# Altium PCB PcbPanel.PcbDoc
Units mm, origin at the board's own origin, x right, y up, seen from the top; angles counter-clockwise.
Board outline 157 x 100.4 mm, 2 copper layers (Top Layer, Bottom Layer), stack 1.092 mm thick; 6 components, 178 nets, 10 pads, 0 vias.
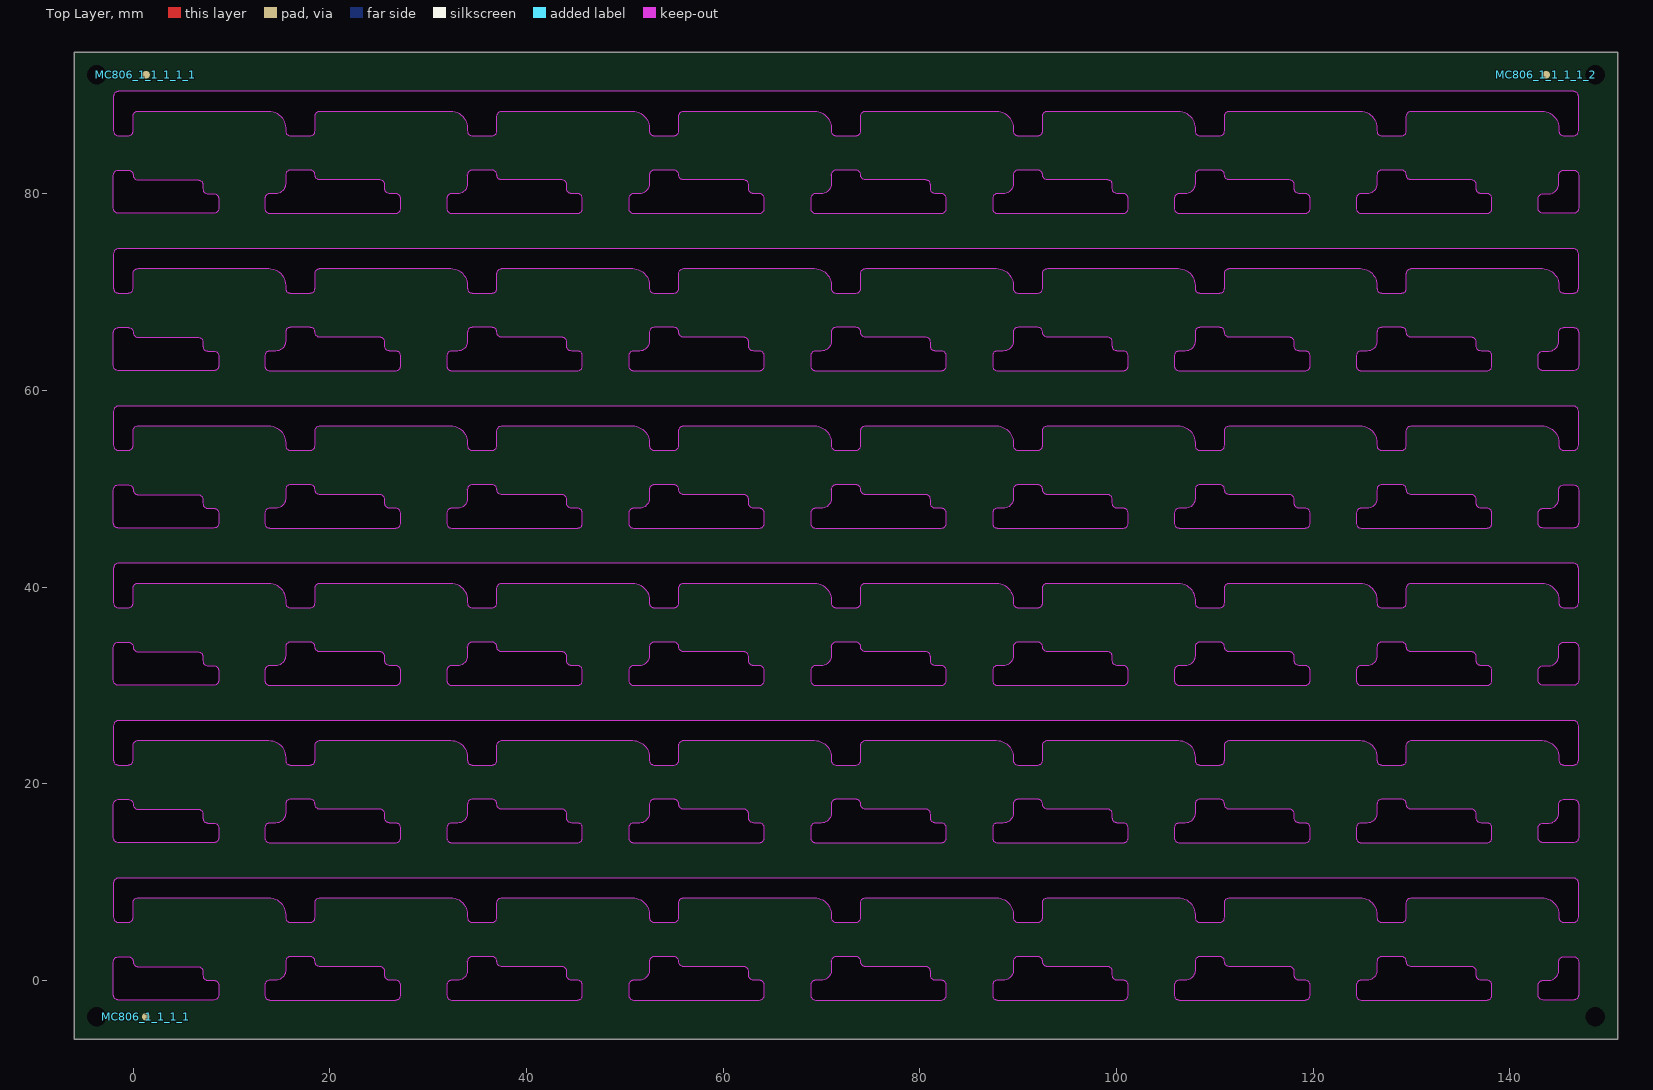
[diagram p0: Top Layer view]
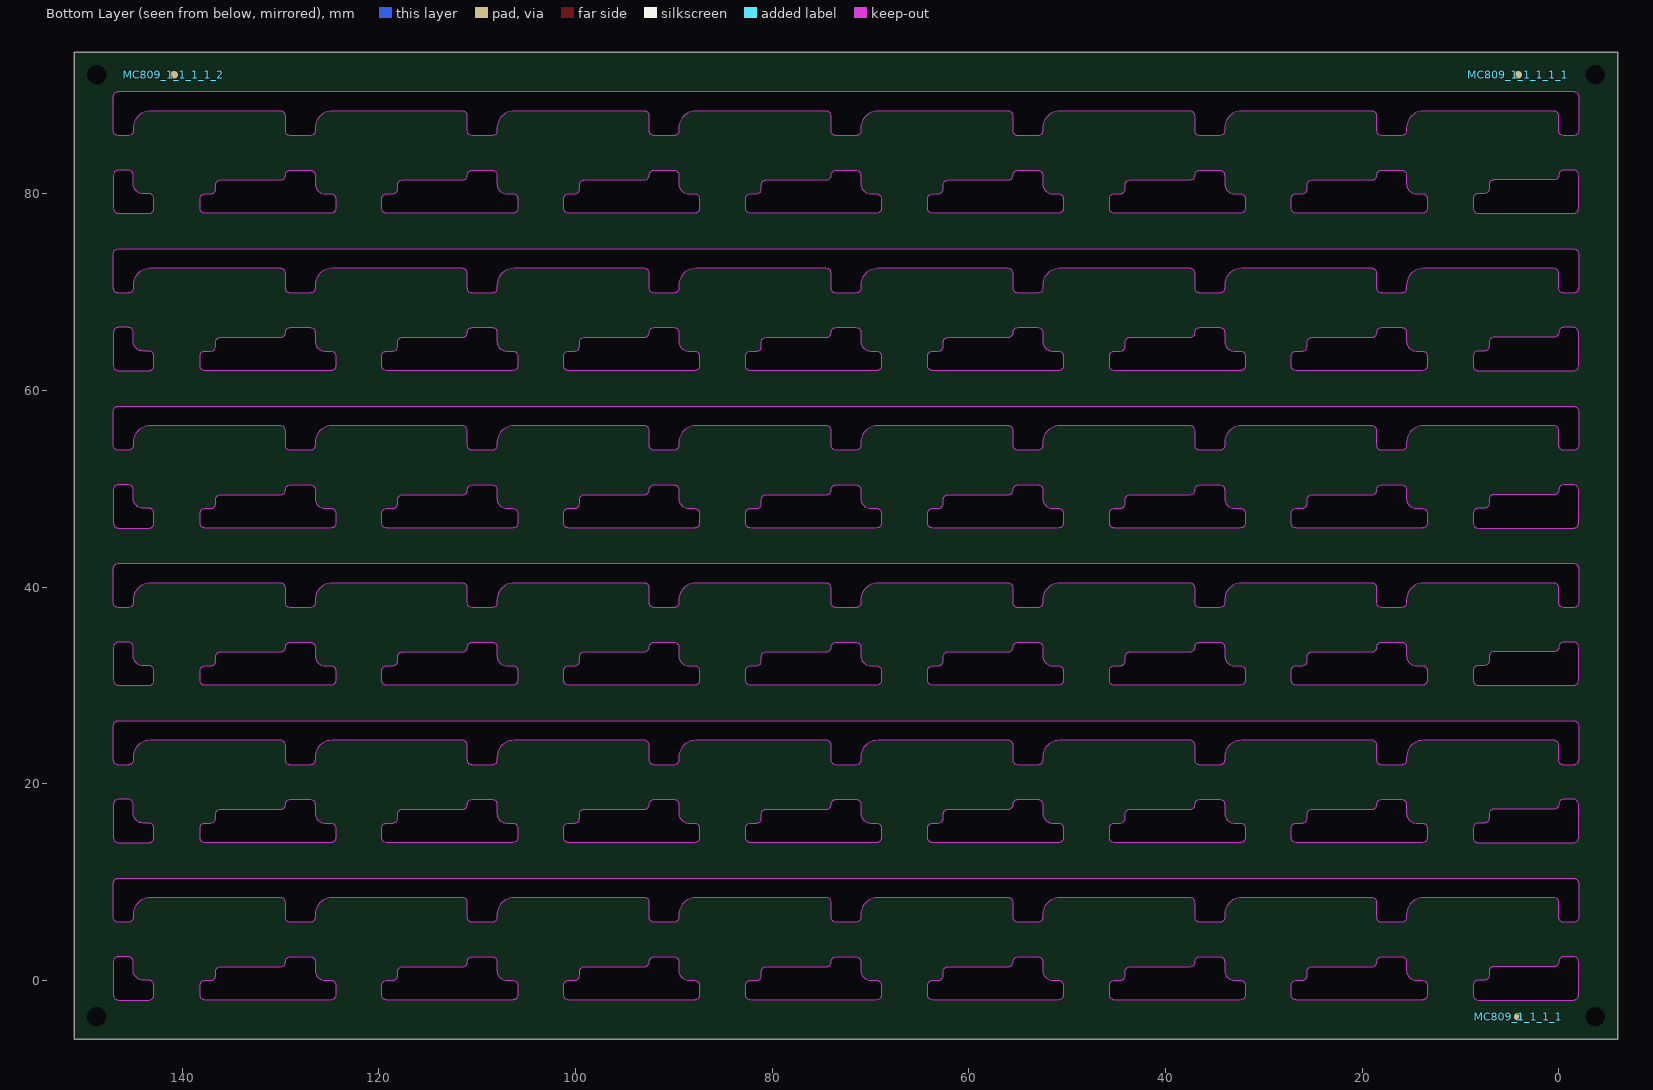
[diagram p1: Bottom Layer view, seen from below]

## Layer stack, top to bottom
Top Solder: solder mask 0.0102, SM-001, Dk 4
Top Layer: signal copper 0.0356
Dielectric 1: prepreg 0.2104, PP-017, Dk 4.3
Dielectric 3: core 0.6, Core-039, Dk 4.8
Dielectric 5: prepreg 0.2104, PP-017, Dk 4.3
Bottom Layer: signal copper 0.0356
Bottom Solder: solder mask 0.0102, SM-001, Dk 4

## Board outline
-6,-6 -6,94.4 151,94.4 151,-6
cut-out: -2,78.5 -2,81.9 cw(c-1.5,81.9) -1.5,82.4 -0.5,82.4 cw(c-0.5,81.9) 0,81.9 ccw(c0.5,81.9) 0.5,81.4 6.6,81.4 cw(c6.6,80.9) 7.1,80.9 7.1,80.5 ccw(c7.6,80.5) 7.6,80 8.2,80 cw(c8.2,79.5) 8.7,79.5 8.7,78.5 cw(c8.2,78.5) 8.2,78 -1.5,78 cw(c-1.5,78.5)
cut-out: 13.4,78.5 ccw(c13.9,78.5) 13.9,78 26.7,78 ccw(c26.7,78.5) 27.2,78.5 27.2,79.5 ccw(c26.7,79.5) 26.7,80 26.1,80 cw(c26.1,80.5) 25.6,80.5 25.6,80.9 ccw(c25.1,80.9) 25.1,81.4 19,81.4 cw(c19,81.9) 18.5,81.9 ccw(c18,81.9) 18,82.4 16,82.4 ccw(c16,81.9) 15.5,81.9 15.5,81 cw(c14.5,81) 14.5,80 13.9,80 ccw(c13.9,79.5) 13.4,79.5
cut-out: 31.9,78.5 ccw(c32.4,78.5) 32.4,78 45.2,78 ccw(c45.2,78.5) 45.7,78.5 45.7,79.5 ccw(c45.2,79.5) 45.2,80 44.6,80 cw(c44.6,80.5) 44.1,80.5 44.1,80.9 ccw(c43.6,80.9) 43.6,81.4 37.5,81.4 cw(c37.5,81.9) 37,81.9 ccw(c36.5,81.9) 36.5,82.4 34.5,82.4 ccw(c34.5,81.9) 34,81.9 34,81.922 34,81 cw(c33,81) 33,80 32.4,80 ccw(c32.4,79.5) 31.9,79.5
cut-out: 50.4,78.5 ccw(c50.9,78.5) 50.9,78 63.7,78 ccw(c63.7,78.5) 64.2,78.5 64.2,79.5 ccw(c63.7,79.5) 63.7,80 63.1,80 cw(c63.1,80.5) 62.6,80.5 62.6,80.9 ccw(c62.1,80.9) 62.1,81.4 56,81.4 cw(c56,81.9) 55.5,81.9 ccw(c55,81.9) 55,82.4 53,82.4 ccw(c53,81.9) 52.5,81.9 52.5,81 cw(c51.5,81) 51.5,80 50.9,80 ccw(c50.9,79.5) 50.4,79.5
cut-out: 68.9,78.5 ccw(c69.4,78.5) 69.4,78 82.2,78 ccw(c82.2,78.5) 82.7,78.5 82.7,79.5 ccw(c82.2,79.5) 82.2,80 81.6,80 cw(c81.6,80.5) 81.1,80.5 81.1,80.9 ccw(c80.6,80.9) 80.6,81.4 74.5,81.4 cw(c74.5,81.9) 74,81.9 ccw(c73.5,81.9) 73.5,82.4 71.5,82.4 ccw(c71.5,81.9) 71,81.9 71,81.922 71,81 cw(c70,81) 70,80 69.4,80 ccw(c69.4,79.5) 68.9,79.5
cut-out: 87.4,78.5 ccw(c87.9,78.5) 87.9,78 100.7,78 ccw(c100.7,78.5) 101.2,78.5 101.2,79.5 ccw(c100.7,79.5) 100.7,80 100.1,80 cw(c100.1,80.5) 99.6,80.5 99.6,80.9 ccw(c99.1,80.9) 99.1,81.4 93,81.4 cw(c93,81.9) 92.5,81.9 ccw(c92,81.9) 92,82.4 90,82.4 ccw(c90,81.9) 89.5,81.9 89.501,81.9 89.5,81 89.501,81 cw(c88.5,81) 88.5,80 87.9,80 ccw(c87.9,79.5) 87.4,79.5
cut-out: 105.9,78.5 ccw(c106.4,78.5) 106.4,78 119.2,78 ccw(c119.2,78.5) 119.7,78.5 119.7,79.5 ccw(c119.2,79.5) 119.2,80 118.6,80 cw(c118.6,80.5) 118.1,80.5 118.1,80.9 ccw(c117.6,80.9) 117.6,81.4 111.5,81.4 cw(c111.5,81.9) 111,81.9 ccw(c110.5,81.9) 110.5,82.4 108.5,82.4 ccw(c108.5,81.9) 108,81.9 108,81 108.001,81 cw(c107,81) 107,80 106.4,80 ccw(c106.4,79.5) 105.9,79.5
cut-out: 124.4,78.5 ccw(c124.9,78.5) 124.9,78 137.7,78 ccw(c137.7,78.5) 138.2,78.5 138.2,79.5 ccw(c137.7,79.5) 137.7,80 137.1,80 cw(c137.1,80.5) 136.6,80.5 136.6,80.9 ccw(c136.1,80.9) 136.1,81.4 130,81.4 cw(c130,81.9) 129.5,81.9 ccw(c129,81.9) 129,82.4 127,82.4 ccw(c127,81.9) 126.5,81.9 126.501,81.9 126.5,81 126.501,81 cw(c125.5,81) 125.5,80 124.9,80 ccw(c124.9,79.5) 124.4,79.5
cut-out: 142.9,78.5 142.9,79.5 cw(c143.4,79.5) 143.4,80 144,80 ccw(c144,81) 145.001,81 145,81 145,81.9 cw(c145.5,81.9) 145.5,82.4 146.5,82.4 cw(c146.5,81.9) 147,81.9 147,78.5 cw(c146.5,78.5) 146.5,78 143.4,78 cw(c143.4,78.5)
cut-out: -0.5,85.9 ccw(c-0.5,86.4) 0,86.4 0,87.9 cw(c0.5,87.9) 0.5,88.4 13.793,88.4 cw(c13.793,86.692) 15.5,86.692 15.5,86.4 ccw(c16,86.4) 16,85.9 18,85.9 ccw(c18,86.4) 18.5,86.4 18.5,87.9 cw(c19,87.9) 19,88.4 32.293,88.4 cw(c32.293,86.692) 34,86.692 34,86.4 ccw(c34.5,86.4) 34.5,85.9 36.5,85.9 ccw(c36.5,86.4) 37,86.4 37,86.398 37,87.9 cw(c37.5,87.9) 37.5,88.4 50.793,88.4 cw(c50.793,86.692) 52.5,86.692 52.5,86.4 ccw(c53,86.4) 53,85.9 55,85.9 ccw(c55,86.4) 55.5,86.4 55.5,87.9 cw(c56,87.9) 56,88.4 69.293,88.4 cw(c69.293,86.692) 71,86.692 71,86.4 ccw(c71.5,86.4) 71.5,85.9 73.5,85.9 ccw(c73.5,86.4) 74,86.4 74,87.9 cw(c74.5,87.9) 74.5,88.4 87.793,88.4 cw(c87.793,86.692) 89.5,86.692 89.5,86.4 ccw(c90,86.4) 90,85.9 92,85.9 ccw(c92,86.4) 92.5,86.4 92.5,86.398 92.5,87.9 cw(c93,87.9) 93,88.4 106.293,88.4 cw(c106.293,86.692) 108.001,86.692 108,86.4 ccw(c108.5,86.4) 108.5,85.9 110.5,85.9 ccw(c110.5,86.4) 111,86.4 111,87.9 cw(c111.5,87.9) 111.5,88.4 124.793,88.4 cw(c124.793,86.692) 126.501,86.692 126.5,86.4 ccw(c127,86.4) 127,85.9 129,85.9 ccw(c129,86.4) 129.5,86.4 129.5,87.9 cw(c130,87.9) 130,88.4 143.293,88.4 cw(c143.293,86.692) 145.001,86.692 145,86.4 ccw(c145.5,86.4) 145.5,85.9 146.5,85.9 ccw(c146.5,86.4) 147,86.4 147,89.9 ccw(c146.5,89.9) 146.5,90.4 -1.5,90.4 ccw(c-1.5,89.9) -2,89.9 -2,86.4 ccw(c-1.5,86.4) -1.5,85.9
cut-out: -2,62.5 -2,65.9 cw(c-1.5,65.9) -1.5,66.4 -0.5,66.4 cw(c-0.5,65.9) 0,65.9 ccw(c0.5,65.9) 0.5,65.4 6.6,65.4 cw(c6.6,64.9) 7.1,64.9 7.1,64.5 ccw(c7.6,64.5) 7.6,64 8.2,64 cw(c8.2,63.5) 8.7,63.5 8.7,62.5 cw(c8.2,62.5) 8.2,62 -1.5,62 cw(c-1.5,62.5)
cut-out: 13.4,62.5 ccw(c13.9,62.5) 13.9,62 26.7,62 ccw(c26.7,62.5) 27.2,62.5 27.2,63.5 ccw(c26.7,63.5) 26.7,64 26.1,64 cw(c26.1,64.5) 25.6,64.5 25.6,64.9 ccw(c25.1,64.9) 25.1,65.4 19,65.4 cw(c19,65.9) 18.5,65.9 ccw(c18,65.9) 18,66.4 16,66.4 ccw(c16,65.9) 15.5,65.9 15.5,65 cw(c14.5,65) 14.5,64 13.9,64 ccw(c13.9,63.5) 13.4,63.5
cut-out: 31.9,62.5 ccw(c32.4,62.5) 32.4,62 45.2,62 ccw(c45.2,62.5) 45.7,62.5 45.7,63.5 ccw(c45.2,63.5) 45.2,64 44.6,64 cw(c44.6,64.5) 44.1,64.5 44.1,64.9 ccw(c43.6,64.9) 43.6,65.4 37.5,65.4 cw(c37.5,65.9) 37,65.9 ccw(c36.5,65.9) 36.5,66.4 34.5,66.4 ccw(c34.5,65.9) 34,65.9 34,65.922 34,65 cw(c33,65) 33,64 32.4,64 ccw(c32.4,63.5) 31.9,63.5
cut-out: 50.4,62.5 ccw(c50.9,62.5) 50.9,62 63.7,62 ccw(c63.7,62.5) 64.2,62.5 64.2,63.5 ccw(c63.7,63.5) 63.7,64 63.1,64 cw(c63.1,64.5) 62.6,64.5 62.6,64.9 ccw(c62.1,64.9) 62.1,65.4 56,65.4 cw(c56,65.9) 55.5,65.9 ccw(c55,65.9) 55,66.4 53,66.4 ccw(c53,65.9) 52.5,65.9 52.5,65 cw(c51.5,65) 51.5,64 50.9,64 ccw(c50.9,63.5) 50.4,63.5
cut-out: 68.9,62.5 ccw(c69.4,62.5) 69.4,62 82.2,62 ccw(c82.2,62.5) 82.7,62.5 82.7,63.5 ccw(c82.2,63.5) 82.2,64 81.6,64 cw(c81.6,64.5) 81.1,64.5 81.1,64.9 ccw(c80.6,64.9) 80.6,65.4 74.5,65.4 cw(c74.5,65.9) 74,65.9 ccw(c73.5,65.9) 73.5,66.4 71.5,66.4 ccw(c71.5,65.9) 71,65.9 71,65.922 71,65 cw(c70,65) 70,64 69.4,64 ccw(c69.4,63.5) 68.9,63.5
cut-out: 87.4,62.5 ccw(c87.9,62.5) 87.9,62 100.7,62 ccw(c100.7,62.5) 101.2,62.5 101.2,63.5 ccw(c100.7,63.5) 100.7,64 100.1,64 cw(c100.1,64.5) 99.6,64.5 99.6,64.9 ccw(c99.1,64.9) 99.1,65.4 93,65.4 cw(c93,65.9) 92.5,65.9 ccw(c92,65.9) 92,66.4 90,66.4 ccw(c90,65.9) 89.5,65.9 89.501,65.9 89.5,65 89.501,65 cw(c88.5,65) 88.5,64 87.9,64 ccw(c87.9,63.5) 87.4,63.5
cut-out: 105.9,62.5 ccw(c106.4,62.5) 106.4,62 119.2,62 ccw(c119.2,62.5) 119.7,62.5 119.7,63.5 ccw(c119.2,63.5) 119.2,64 118.6,64 cw(c118.6,64.5) 118.1,64.5 118.1,64.9 ccw(c117.6,64.9) 117.6,65.4 111.5,65.4 cw(c111.5,65.9) 111,65.9 ccw(c110.5,65.9) 110.5,66.4 108.5,66.4 ccw(c108.5,65.9) 108,65.9 108,65 108.001,65 cw(c107,65) 107,64 106.4,64 ccw(c106.4,63.5) 105.9,63.5
cut-out: 124.4,62.5 ccw(c124.9,62.5) 124.9,62 137.7,62 ccw(c137.7,62.5) 138.2,62.5 138.2,63.5 ccw(c137.7,63.5) 137.7,64 137.1,64 cw(c137.1,64.5) 136.6,64.5 136.6,64.9 ccw(c136.1,64.9) 136.1,65.4 130,65.4 cw(c130,65.9) 129.5,65.9 ccw(c129,65.9) 129,66.4 127,66.4 ccw(c127,65.9) 126.5,65.9 126.501,65.9 126.5,65 126.501,65 cw(c125.5,65) 125.5,64 124.9,64 ccw(c124.9,63.5) 124.4,63.5
cut-out: 142.9,62.5 142.9,63.5 cw(c143.4,63.5) 143.4,64 144,64 ccw(c144,65) 145.001,65 145,65 145,65.9 cw(c145.5,65.9) 145.5,66.4 146.5,66.4 cw(c146.5,65.9) 147,65.9 147,62.5 cw(c146.5,62.5) 146.5,62 143.4,62 cw(c143.4,62.5)
cut-out: -0.5,69.9 ccw(c-0.5,70.4) 0,70.4 0,71.9 cw(c0.5,71.9) 0.5,72.4 13.793,72.4 cw(c13.793,70.692) 15.5,70.692 15.5,70.4 ccw(c16,70.4) 16,69.9 18,69.9 ccw(c18,70.4) 18.5,70.4 18.5,71.9 cw(c19,71.9) 19,72.4 32.293,72.4 cw(c32.293,70.692) 34,70.692 34,70.4 ccw(c34.5,70.4) 34.5,69.9 36.5,69.9 ccw(c36.5,70.4) 37,70.4 37,70.398 37,71.9 cw(c37.5,71.9) 37.5,72.4 50.793,72.4 cw(c50.793,70.692) 52.5,70.692 52.5,70.4 ccw(c53,70.4) 53,69.9 55,69.9 ccw(c55,70.4) 55.5,70.4 55.5,71.9 cw(c56,71.9) 56,72.4 69.293,72.4 cw(c69.293,70.692) 71,70.692 71,70.4 ccw(c71.5,70.4) 71.5,69.9 73.5,69.9 ccw(c73.5,70.4) 74,70.4 74,71.9 cw(c74.5,71.9) 74.5,72.4 87.793,72.4 cw(c87.793,70.692) 89.5,70.692 89.5,70.4 ccw(c90,70.4) 90,69.9 92,69.9 ccw(c92,70.4) 92.5,70.4 92.5,70.398 92.5,71.9 cw(c93,71.9) 93,72.4 106.293,72.4 cw(c106.293,70.692) 108.001,70.692 108,70.4 ccw(c108.5,70.4) 108.5,69.9 110.5,69.9 ccw(c110.5,70.4) 111,70.4 111,71.9 cw(c111.5,71.9) 111.5,72.4 124.793,72.4 cw(c124.793,70.692) 126.501,70.692 126.5,70.4 ccw(c127,70.4) 127,69.9 129,69.9 ccw(c129,70.4) 129.5,70.4 129.5,71.9 cw(c130,71.9) 130,72.4 143.293,72.4 cw(c143.293,70.692) 145.001,70.692 145,70.4 ccw(c145.5,70.4) 145.5,69.9 146.5,69.9 ccw(c146.5,70.4) 147,70.4 147,73.9 ccw(c146.5,73.9) 146.5,74.4 -1.5,74.4 ccw(c-1.5,73.9) -2,73.9 -2,70.4 ccw(c-1.5,70.4) -1.5,69.9
cut-out: -2,46.5 -2,49.9 cw(c-1.5,49.9) -1.5,50.4 -0.5,50.4 cw(c-0.5,49.9) 0,49.9 ccw(c0.5,49.9) 0.5,49.4 6.6,49.4 cw(c6.6,48.9) 7.1,48.9 7.1,48.5 ccw(c7.6,48.5) 7.6,48 8.2,48 cw(c8.2,47.5) 8.7,47.5 8.7,46.5 cw(c8.2,46.5) 8.2,46 -1.5,46 cw(c-1.5,46.5)
cut-out: 13.4,46.5 ccw(c13.9,46.5) 13.9,46 26.7,46 ccw(c26.7,46.5) 27.2,46.5 27.2,47.5 ccw(c26.7,47.5) 26.7,48 26.1,48 cw(c26.1,48.5) 25.6,48.5 25.6,48.9 ccw(c25.1,48.9) 25.1,49.4 19,49.4 cw(c19,49.9) 18.5,49.9 ccw(c18,49.9) 18,50.4 16,50.4 ccw(c16,49.9) 15.5,49.9 15.5,49 cw(c14.5,49) 14.5,48 13.9,48 ccw(c13.9,47.5) 13.4,47.5
cut-out: 31.9,46.5 ccw(c32.4,46.5) 32.4,46 45.2,46 ccw(c45.2,46.5) 45.7,46.5 45.7,47.5 ccw(c45.2,47.5) 45.2,48 44.6,48 cw(c44.6,48.5) 44.1,48.5 44.1,48.9 ccw(c43.6,48.9) 43.6,49.4 37.5,49.4 cw(c37.5,49.9) 37,49.9 ccw(c36.5,49.9) 36.5,50.4 34.5,50.4 ccw(c34.5,49.9) 34,49.9 34,49.922 34,49 cw(c33,49) 33,48 32.4,48 ccw(c32.4,47.5) 31.9,47.5
cut-out: 50.4,46.5 ccw(c50.9,46.5) 50.9,46 63.7,46 ccw(c63.7,46.5) 64.2,46.5 64.2,47.5 ccw(c63.7,47.5) 63.7,48 63.1,48 cw(c63.1,48.5) 62.6,48.5 62.6,48.9 ccw(c62.1,48.9) 62.1,49.4 56,49.4 cw(c56,49.9) 55.5,49.9 ccw(c55,49.9) 55,50.4 53,50.4 ccw(c53,49.9) 52.5,49.9 52.5,49 cw(c51.5,49) 51.5,48 50.9,48 ccw(c50.9,47.5) 50.4,47.5
cut-out: 68.9,46.5 ccw(c69.4,46.5) 69.4,46 82.2,46 ccw(c82.2,46.5) 82.7,46.5 82.7,47.5 ccw(c82.2,47.5) 82.2,48 81.6,48 cw(c81.6,48.5) 81.1,48.5 81.1,48.9 ccw(c80.6,48.9) 80.6,49.4 74.5,49.4 cw(c74.5,49.9) 74,49.9 ccw(c73.5,49.9) 73.5,50.4 71.5,50.4 ccw(c71.5,49.9) 71,49.9 71,49.922 71,49 cw(c70,49) 70,48 69.4,48 ccw(c69.4,47.5) 68.9,47.5
cut-out: 87.4,46.5 ccw(c87.9,46.5) 87.9,46 100.7,46 ccw(c100.7,46.5) 101.2,46.5 101.2,47.5 ccw(c100.7,47.5) 100.7,48 100.1,48 cw(c100.1,48.5) 99.6,48.5 99.6,48.9 ccw(c99.1,48.9) 99.1,49.4 93,49.4 cw(c93,49.9) 92.5,49.9 ccw(c92,49.9) 92,50.4 90,50.4 ccw(c90,49.9) 89.5,49.9 89.501,49.9 89.5,49 89.501,49 cw(c88.5,49) 88.5,48 87.9,48 ccw(c87.9,47.5) 87.4,47.5
cut-out: 105.9,46.5 ccw(c106.4,46.5) 106.4,46 119.2,46 ccw(c119.2,46.5) 119.7,46.5 119.7,47.5 ccw(c119.2,47.5) 119.2,48 118.6,48 cw(c118.6,48.5) 118.1,48.5 118.1,48.9 ccw(c117.6,48.9) 117.6,49.4 111.5,49.4 cw(c111.5,49.9) 111,49.9 ccw(c110.5,49.9) 110.5,50.4 108.5,50.4 ccw(c108.5,49.9) 108,49.9 108,49 108.001,49 cw(c107,49) 107,48 106.4,48 ccw(c106.4,47.5) 105.9,47.5
cut-out: 124.4,46.5 ccw(c124.9,46.5) 124.9,46 137.7,46 ccw(c137.7,46.5) 138.2,46.5 138.2,47.5 ccw(c137.7,47.5) 137.7,48 137.1,48 cw(c137.1,48.5) 136.6,48.5 136.6,48.9 ccw(c136.1,48.9) 136.1,49.4 130,49.4 cw(c130,49.9) 129.5,49.9 ccw(c129,49.9) 129,50.4 127,50.4 ccw(c127,49.9) 126.5,49.9 126.501,49.9 126.5,49 126.501,49 cw(c125.5,49) 125.5,48 124.9,48 ccw(c124.9,47.5) 124.4,47.5
cut-out: 142.9,46.5 142.9,47.5 cw(c143.4,47.5) 143.4,48 144,48 ccw(c144,49) 145.001,49 145,49 145,49.9 cw(c145.5,49.9) 145.5,50.4 146.5,50.4 cw(c146.5,49.9) 147,49.9 147,46.5 cw(c146.5,46.5) 146.5,46 143.4,46 cw(c143.4,46.5)
cut-out: -0.5,53.9 ccw(c-0.5,54.4) 0,54.4 0,55.9 cw(c0.5,55.9) 0.5,56.4 13.793,56.4 cw(c13.793,54.692) 15.5,54.692 15.5,54.4 ccw(c16,54.4) 16,53.9 18,53.9 ccw(c18,54.4) 18.5,54.4 18.5,55.9 cw(c19,55.9) 19,56.4 32.293,56.4 cw(c32.293,54.692) 34,54.692 34,54.4 ccw(c34.5,54.4) 34.5,53.9 36.5,53.9 ccw(c36.5,54.4) 37,54.4 37,54.398 37,55.9 cw(c37.5,55.9) 37.5,56.4 50.793,56.4 cw(c50.793,54.692) 52.5,54.692 52.5,54.4 ccw(c53,54.4) 53,53.9 55,53.9 ccw(c55,54.4) 55.5,54.4 55.5,55.9 cw(c56,55.9) 56,56.4 69.293,56.4 cw(c69.293,54.692) 71,54.692 71,54.4 ccw(c71.5,54.4) 71.5,53.9 73.5,53.9 ccw(c73.5,54.4) 74,54.4 74,55.9 cw(c74.5,55.9) 74.5,56.4 87.793,56.4 cw(c87.793,54.692) 89.5,54.692 89.5,54.4 ccw(c90,54.4) 90,53.9 92,53.9 ccw(c92,54.4) 92.5,54.4 92.5,54.398 92.5,55.9 cw(c93,55.9) 93,56.4 106.293,56.4 cw(c106.293,54.692) 108.001,54.692 108,54.4 ccw(c108.5,54.4) 108.5,53.9 110.5,53.9 ccw(c110.5,54.4) 111,54.4 111,55.9 cw(c111.5,55.9) 111.5,56.4 124.793,56.4 cw(c124.793,54.692) 126.501,54.692 126.5,54.4 ccw(c127,54.4) 127,53.9 129,53.9 ccw(c129,54.4) 129.5,54.4 129.5,55.9 cw(c130,55.9) 130,56.4 143.293,56.4 cw(c143.293,54.692) 145.001,54.692 145,54.4 ccw(c145.5,54.4) 145.5,53.9 146.5,53.9 ccw(c146.5,54.4) 147,54.4 147,57.9 ccw(c146.5,57.9) 146.5,58.4 -1.5,58.4 ccw(c-1.5,57.9) -2,57.9 -2,54.4 ccw(c-1.5,54.4) -1.5,53.9
cut-out: -2,30.5 -2,33.9 cw(c-1.5,33.9) -1.5,34.4 -0.5,34.4 cw(c-0.5,33.9) 0,33.9 ccw(c0.5,33.9) 0.5,33.4 6.6,33.4 cw(c6.6,32.9) 7.1,32.9 7.1,32.5 ccw(c7.6,32.5) 7.6,32 8.2,32 cw(c8.2,31.5) 8.7,31.5 8.7,30.5 cw(c8.2,30.5) 8.2,30 -1.5,30 cw(c-1.5,30.5)
cut-out: 13.4,30.5 ccw(c13.9,30.5) 13.9,30 26.7,30 ccw(c26.7,30.5) 27.2,30.5 27.2,31.5 ccw(c26.7,31.5) 26.7,32 26.1,32 cw(c26.1,32.5) 25.6,32.5 25.6,32.9 ccw(c25.1,32.9) 25.1,33.4 19,33.4 cw(c19,33.9) 18.5,33.9 ccw(c18,33.9) 18,34.4 16,34.4 ccw(c16,33.9) 15.5,33.9 15.5,33 cw(c14.5,33) 14.5,32 13.9,32 ccw(c13.9,31.5) 13.4,31.5
cut-out: 31.9,30.5 ccw(c32.4,30.5) 32.4,30 45.2,30 ccw(c45.2,30.5) 45.7,30.5 45.7,31.5 ccw(c45.2,31.5) 45.2,32 44.6,32 cw(c44.6,32.5) 44.1,32.5 44.1,32.9 ccw(c43.6,32.9) 43.6,33.4 37.5,33.4 cw(c37.5,33.9) 37,33.9 ccw(c36.5,33.9) 36.5,34.4 34.5,34.4 ccw(c34.5,33.9) 34,33.9 34,33.922 34,33 cw(c33,33) 33,32 32.4,32 ccw(c32.4,31.5) 31.9,31.5
cut-out: 50.4,30.5 ccw(c50.9,30.5) 50.9,30 63.7,30 ccw(c63.7,30.5) 64.2,30.5 64.2,31.5 ccw(c63.7,31.5) 63.7,32 63.1,32 cw(c63.1,32.5) 62.6,32.5 62.6,32.9 ccw(c62.1,32.9) 62.1,33.4 56,33.4 cw(c56,33.9) 55.5,33.9 ccw(c55,33.9) 55,34.4 53,34.4 ccw(c53,33.9) 52.5,33.9 52.5,33 cw(c51.5,33) 51.5,32 50.9,32 ccw(c50.9,31.5) 50.4,31.5
cut-out: 68.9,30.5 ccw(c69.4,30.5) 69.4,30 82.2,30 ccw(c82.2,30.5) 82.7,30.5 82.7,31.5 ccw(c82.2,31.5) 82.2,32 81.6,32 cw(c81.6,32.5) 81.1,32.5 81.1,32.9 ccw(c80.6,32.9) 80.6,33.4 74.5,33.4 cw(c74.5,33.9) 74,33.9 ccw(c73.5,33.9) 73.5,34.4 71.5,34.4 ccw(c71.5,33.9) 71,33.9 71,33.922 71,33 cw(c70,33) 70,32 69.4,32 ccw(c69.4,31.5) 68.9,31.5
cut-out: 87.4,30.5 ccw(c87.9,30.5) 87.9,30 100.7,30 ccw(c100.7,30.5) 101.2,30.5 101.2,31.5 ccw(c100.7,31.5) 100.7,32 100.1,32 cw(c100.1,32.5) 99.6,32.5 99.6,32.9 ccw(c99.1,32.9) 99.1,33.4 93,33.4 cw(c93,33.9) 92.5,33.9 ccw(c92,33.9) 92,34.4 90,34.4 ccw(c90,33.9) 89.5,33.9 89.501,33.9 89.5,33 89.501,33 cw(c88.5,33) 88.5,32 87.9,32 ccw(c87.9,31.5) 87.4,31.5
cut-out: 105.9,30.5 ccw(c106.4,30.5) 106.4,30 119.2,30 ccw(c119.2,30.5) 119.7,30.5 119.7,31.5 ccw(c119.2,31.5) 119.2,32 118.6,32 cw(c118.6,32.5) 118.1,32.5 118.1,32.9 ccw(c117.6,32.9) 117.6,33.4 111.5,33.4 cw(c111.5,33.9) 111,33.9 ccw(c110.5,33.9) 110.5,34.4 108.5,34.4 ccw(c108.5,33.9) 108,33.9 108,33 108.001,33 cw(c107,33) 107,32 106.4,32 ccw(c106.4,31.5) 105.9,31.5
cut-out: 124.4,30.5 ccw(c124.9,30.5) 124.9,30 137.7,30 ccw(c137.7,30.5) 138.2,30.5 138.2,31.5 ccw(c137.7,31.5) 137.7,32 137.1,32 cw(c137.1,32.5) 136.6,32.5 136.6,32.9 ccw(c136.1,32.9) 136.1,33.4 130,33.4 cw(c130,33.9) 129.5,33.9 ccw(c129,33.9) 129,34.4 127,34.4 ccw(c127,33.9) 126.5,33.9 126.501,33.9 126.5,33 126.501,33 cw(c125.5,33) 125.5,32 124.9,32 ccw(c124.9,31.5) 124.4,31.5
cut-out: 142.9,30.5 142.9,31.5 cw(c143.4,31.5) 143.4,32 144,32 ccw(c144,33) 145.001,33 145,33 145,33.9 cw(c145.5,33.9) 145.5,34.4 146.5,34.4 cw(c146.5,33.9) 147,33.9 147,30.5 cw(c146.5,30.5) 146.5,30 143.4,30 cw(c143.4,30.5)
cut-out: -0.5,37.9 ccw(c-0.5,38.4) 0,38.4 0,39.9 cw(c0.5,39.9) 0.5,40.4 13.793,40.4 cw(c13.793,38.692) 15.5,38.692 15.5,38.4 ccw(c16,38.4) 16,37.9 18,37.9 ccw(c18,38.4) 18.5,38.4 18.5,39.9 cw(c19,39.9) 19,40.4 32.293,40.4 cw(c32.293,38.692) 34,38.692 34,38.4 ccw(c34.5,38.4) 34.5,37.9 36.5,37.9 ccw(c36.5,38.4) 37,38.4 37,38.398 37,39.9 cw(c37.5,39.9) 37.5,40.4 50.793,40.4 cw(c50.793,38.692) 52.5,38.692 52.5,38.4 ccw(c53,38.4) 53,37.9 55,37.9 ccw(c55,38.4) 55.5,38.4 55.5,39.9 cw(c56,39.9) 56,40.4 69.293,40.4 cw(c69.293,38.692) 71,38.692 71,38.4 ccw(c71.5,38.4) 71.5,37.9 73.5,37.9 ccw(c73.5,38.4) 74,38.4 74,39.9 cw(c74.5,39.9) 74.5,40.4 87.793,40.4 cw(c87.793,38.692) 89.5,38.692 89.5,38.4 ccw(c90,38.4) 90,37.9 92,37.9 ccw(c92,38.4) 92.5,38.4 92.5,38.398 92.5,39.9 cw(c93,39.9) 93,40.4 106.293,40.4 cw(c106.293,38.692) 108.001,38.692 108,38.4 ccw(c108.5,38.4) 108.5,37.9 110.5,37.9 ccw(c110.5,38.4) 111,38.4 111,39.9 cw(c111.5,39.9) 111.5,40.4 124.793,40.4 cw(c124.793,38.692) 126.501,38.692 126.5,38.4 ccw(c127,38.4) 127,37.9 129,37.9 ccw(c129,38.4) 129.5,38.4 129.5,39.9 cw(c130,39.9) 130,40.4 143.293,40.4 cw(c143.293,38.692) 145.001,38.692 145,38.4 ccw(c145.5,38.4) 145.5,37.9 146.5,37.9 ccw(c146.5,38.4) 147,38.4 147,41.9 ccw(c146.5,41.9) 146.5,42.4 -1.5,42.4 ccw(c-1.5,41.9) -2,41.9 -2,38.4 ccw(c-1.5,38.4) -1.5,37.9
cut-out: -2,14.5 -2,17.9 cw(c-1.5,17.9) -1.5,18.4 -0.5,18.4 cw(c-0.5,17.9) 0,17.9 ccw(c0.5,17.9) 0.5,17.4 6.6,17.4 cw(c6.6,16.9) 7.1,16.9 7.1,16.5 ccw(c7.6,16.5) 7.6,16 8.2,16 cw(c8.2,15.5) 8.7,15.5 8.7,14.5 cw(c8.2,14.5) 8.2,14 -1.5,14 cw(c-1.5,14.5)
cut-out: 13.4,14.5 ccw(c13.9,14.5) 13.9,14 26.7,14 ccw(c26.7,14.5) 27.2,14.5 27.2,15.5 ccw(c26.7,15.5) 26.7,16 26.1,16 cw(c26.1,16.5) 25.6,16.5 25.6,16.9 ccw(c25.1,16.9) 25.1,17.4 19,17.4 cw(c19,17.9) 18.5,17.9 ccw(c18,17.9) 18,18.4 16,18.4 ccw(c16,17.9) 15.5,17.9 15.5,17 cw(c14.5,17) 14.5,16 13.9,16 ccw(c13.9,15.5) 13.4,15.5
cut-out: 31.9,14.5 ccw(c32.4,14.5) 32.4,14 45.2,14 ccw(c45.2,14.5) 45.7,14.5 45.7,15.5 ccw(c45.2,15.5) 45.2,16 44.6,16 cw(c44.6,16.5) 44.1,16.5 44.1,16.9 ccw(c43.6,16.9) 43.6,17.4 37.5,17.4 cw(c37.5,17.9) 37,17.9 ccw(c36.5,17.9) 36.5,18.4 34.5,18.4 ccw(c34.5,17.9) 34,17.9 34,17.922 34,17 cw(c33,17) 33,16 32.4,16 ccw(c32.4,15.5) 31.9,15.5
cut-out: 50.4,14.5 ccw(c50.9,14.5) 50.9,14 63.7,14 ccw(c63.7,14.5) 64.2,14.5 64.2,15.5 ccw(c63.7,15.5) 63.7,16 63.1,16 cw(c63.1,16.5) 62.6,16.5 62.6,16.9 ccw(c62.1,16.9) 62.1,17.4 56,17.4 cw(c56,17.9) 55.5,17.9 ccw(c55,17.9) 55,18.4 53,18.4 ccw(c53,17.9) 52.5,17.9 52.5,17 cw(c51.5,17) 51.5,16 50.9,16 ccw(c50.9,15.5) 50.4,15.5
cut-out: 68.9,14.5 ccw(c69.4,14.5) 69.4,14 82.2,14 ccw(c82.2,14.5) 82.7,14.5 82.7,15.5 ccw(c82.2,15.5) 82.2,16 81.6,16 cw(c81.6,16.5) 81.1,16.5 81.1,16.9 ccw(c80.6,16.9) 80.6,17.4 74.5,17.4 cw(c74.5,17.9) 74,17.9 ccw(c73.5,17.9) 73.5,18.4 71.5,18.4 ccw(c71.5,17.9) 71,17.9 71,17.922 71,17 cw(c70,17) 70,16 69.4,16 ccw(c69.4,15.5) 68.9,15.5
cut-out: 87.4,14.5 ccw(c87.9,14.5) 87.9,14 100.7,14 ccw(c100.7,14.5) 101.2,14.5 101.2,15.5 ccw(c100.7,15.5) 100.7,16 100.1,16 cw(c100.1,16.5) 99.6,16.5 99.6,16.9 ccw(c99.1,16.9) 99.1,17.4 93,17.4 cw(c93,17.9) 92.5,17.9 ccw(c92,17.9) 92,18.4 90,18.4 ccw(c90,17.9) 89.5,17.9 89.501,17.9 89.5,17 89.501,17 cw(c88.5,17) 88.5,16 87.9,16 ccw(c87.9,15.5) 87.4,15.5
cut-out: 105.9,14.5 ccw(c106.4,14.5) 106.4,14 119.2,14 ccw(c119.2,14.5) 119.7,14.5 119.7,15.5 ccw(c119.2,15.5) 119.2,16 118.6,16 cw(c118.6,16.5) 118.1,16.5 118.1,16.9 ccw(c117.6,16.9) 117.6,17.4 111.5,17.4 cw(c111.5,17.9) 111,17.9 ccw(c110.5,17.9) 110.5,18.4 108.5,18.4 ccw(c108.5,17.9) 108,17.9 108,17 108.001,17 cw(c107,17) 107,16 106.4,16 ccw(c106.4,15.5) 105.9,15.5
cut-out: 124.4,14.5 ccw(c124.9,14.5) 124.9,14 137.7,14 ccw(c137.7,14.5) 138.2,14.5 138.2,15.5 ccw(c137.7,15.5) 137.7,16 137.1,16 cw(c137.1,16.5) 136.6,16.5 136.6,16.9 ccw(c136.1,16.9) 136.1,17.4 130,17.4 cw(c130,17.9) 129.5,17.9 ccw(c129,17.9) 129,18.4 127,18.4 ccw(c127,17.9) 126.5,17.9 126.501,17.9 126.5,17 126.501,17 cw(c125.5,17) 125.5,16 124.9,16 ccw(c124.9,15.5) 124.4,15.5
cut-out: 142.9,14.5 142.9,15.5 cw(c143.4,15.5) 143.4,16 144,16 ccw(c144,17) 145.001,17 145,17 145,17.9 cw(c145.5,17.9) 145.5,18.4 146.5,18.4 cw(c146.5,17.9) 147,17.9 147,14.5 cw(c146.5,14.5) 146.5,14 143.4,14 cw(c143.4,14.5)
cut-out: -0.5,21.9 ccw(c-0.5,22.4) 0,22.4 0,23.9 cw(c0.5,23.9) 0.5,24.4 13.793,24.4 cw(c13.793,22.692) 15.5,22.692 15.5,22.4 ccw(c16,22.4) 16,21.9 18,21.9 ccw(c18,22.4) 18.5,22.4 18.5,23.9 cw(c19,23.9) 19,24.4 32.293,24.4 cw(c32.293,22.692) 34,22.692 34,22.4 ccw(c34.5,22.4) 34.5,21.9 36.5,21.9 ccw(c36.5,22.4) 37,22.4 37,22.398 37,23.9 cw(c37.5,23.9) 37.5,24.4 50.793,24.4 cw(c50.793,22.692) 52.5,22.692 52.5,22.4 ccw(c53,22.4) 53,21.9 55,21.9 ccw(c55,22.4) 55.5,22.4 55.5,23.9 cw(c56,23.9) 56,24.4 69.293,24.4 cw(c69.293,22.692) 71,22.692 71,22.4 ccw(c71.5,22.4) 71.5,21.9 73.5,21.9 ccw(c73.5,22.4) 74,22.4 74,23.9 cw(c74.5,23.9) 74.5,24.4 87.793,24.4 cw(c87.793,22.692) 89.5,22.692 89.5,22.4 ccw(c90,22.4) 90,21.9 92,21.9 ccw(c92,22.4) 92.5,22.4 92.5,22.398 92.5,23.9 cw(c93,23.9) 93,24.4 106.293,24.4 cw(c106.293,22.692) 108.001,22.692 108,22.4 ccw(c108.5,22.4) 108.5,21.9 110.5,21.9 ccw(c110.5,22.4) 111,22.4 111,23.9 cw(c111.5,23.9) 111.5,24.4 124.793,24.4 cw(c124.793,22.692) 126.501,22.692 126.5,22.4 ccw(c127,22.4) 127,21.9 129,21.9 ccw(c129,22.4) 129.5,22.4 129.5,23.9 cw(c130,23.9) 130,24.4 143.293,24.4 cw(c143.293,22.692) 145.001,22.692 145,22.4 ccw(c145.5,22.4) 145.5,21.9 146.5,21.9 ccw(c146.5,22.4) 147,22.4 147,25.9 ccw(c146.5,25.9) 146.5,26.4 -1.5,26.4 ccw(c-1.5,25.9) -2,25.9 -2,22.4 ccw(c-1.5,22.4) -1.5,21.9
cut-out: -0.5,5.9 ccw(c-0.5,6.4) 0,6.4 0,7.9 cw(c0.5,7.9) 0.5,8.4 13.793,8.4 cw(c13.793,6.692) 15.5,6.692 15.5,6.4 ccw(c16,6.4) 16,5.9 18,5.9 ccw(c18,6.4) 18.5,6.4 18.5,7.9 cw(c19,7.9) 19,8.4 32.293,8.4 cw(c32.293,6.692) 34,6.692 34,6.4 ccw(c34.5,6.4) 34.5,5.9 36.5,5.9 ccw(c36.5,6.4) 37,6.4 37,6.398 37,7.9 cw(c37.5,7.9) 37.5,8.4 50.793,8.4 cw(c50.793,6.692) 52.5,6.692 52.5,6.4 ccw(c53,6.4) 53,5.9 55,5.9 ccw(c55,6.4) 55.5,6.4 55.5,7.9 cw(c56,7.9) 56,8.4 69.293,8.4 cw(c69.293,6.692) 71,6.692 71,6.4 ccw(c71.5,6.4) 71.5,5.9 73.5,5.9 ccw(c73.5,6.4) 74,6.4 74,7.9 cw(c74.5,7.9) 74.5,8.4 87.793,8.4 cw(c87.793,6.692) 89.5,6.692 89.5,6.4 ccw(c90,6.4) 90,5.9 92,5.9 ccw(c92,6.4) 92.5,6.4 92.5,6.398 92.5,7.9 cw(c93,7.9) 93,8.4 106.293,8.4 cw(c106.293,6.692) 108.001,6.692 108,6.4 ccw(c108.5,6.4) 108.5,5.9 110.5,5.9 ccw(c110.5,6.4) 111,6.4 111,7.9 cw(c111.5,7.9) 111.5,8.4 124.793,8.4 cw(c124.793,6.692) 126.501,6.692 126.5,6.4 ccw(c127,6.4) 127,5.9 129,5.9 ccw(c129,6.4) 129.5,6.4 129.5,7.9 cw(c130,7.9) 130,8.4 143.293,8.4 cw(c143.293,6.692) 145.001,6.692 145,6.4 ccw(c145.5,6.4) 145.5,5.9 146.5,5.9 ccw(c146.5,6.4) 147,6.4 147,9.9 ccw(c146.5,9.9) 146.5,10.4 -1.5,10.4 ccw(c-1.5,9.9) -2,9.9 -2,6.4 ccw(c-1.5,6.4) -1.5,5.9
cut-out: 142.9,-1.5 142.9,-0.5 cw(c143.4,-0.5) 143.4,0 144,0 ccw(c144,1) 145.001,1 145,1 145,1.9 cw(c145.5,1.9) 145.5,2.4 146.5,2.4 cw(c146.5,1.9) 147,1.9 147,-1.5 cw(c146.5,-1.5) 146.5,-2 143.4,-2 cw(c143.4,-1.5)
cut-out: 124.4,-1.5 ccw(c124.9,-1.5) 124.9,-2 137.7,-2 ccw(c137.7,-1.5) 138.2,-1.5 138.2,-0.5 ccw(c137.7,-0.5) 137.7,0 137.1,0 cw(c137.1,0.5) 136.6,0.5 136.6,0.9 ccw(c136.1,0.9) 136.1,1.4 130,1.4 cw(c130,1.9) 129.5,1.9 ccw(c129,1.9) 129,2.4 127,2.4 ccw(c127,1.9) 126.5,1.9 126.501,1.9 126.5,1 126.501,1 cw(c125.5,1) 125.5,0 124.9,0 ccw(c124.9,-0.5) 124.4,-0.5
cut-out: 105.9,-1.5 ccw(c106.4,-1.5) 106.4,-2 119.2,-2 ccw(c119.2,-1.5) 119.7,-1.5 119.7,-0.5 ccw(c119.2,-0.5) 119.2,0 118.6,0 cw(c118.6,0.5) 118.1,0.5 118.1,0.9 ccw(c117.6,0.9) 117.6,1.4 111.5,1.4 cw(c111.5,1.9) 111,1.9 ccw(c110.5,1.9) 110.5,2.4 108.5,2.4 ccw(c108.5,1.9) 108,1.9 108,1 108.001,1 cw(c107,1) 107,0 106.4,0 ccw(c106.4,-0.5) 105.9,-0.5
cut-out: 87.4,-1.5 ccw(c87.9,-1.5) 87.9,-2 100.7,-2 ccw(c100.7,-1.5) 101.2,-1.5 101.2,-0.5 ccw(c100.7,-0.5) 100.7,0 100.1,0 cw(c100.1,0.5) 99.6,0.5 99.6,0.9 ccw(c99.1,0.9) 99.1,1.4 93,1.4 cw(c93,1.9) 92.5,1.9 ccw(c92,1.9) 92,2.4 90,2.4 ccw(c90,1.9) 89.5,1.9 89.501,1.9 89.5,1 89.501,1 cw(c88.5,1) 88.5,0 87.9,0 ccw(c87.9,-0.5) 87.4,-0.5
cut-out: 68.9,-1.5 ccw(c69.4,-1.5) 69.4,-2 82.2,-2 ccw(c82.2,-1.5) 82.7,-1.5 82.7,-0.5 ccw(c82.2,-0.5) 82.2,0 81.6,0 cw(c81.6,0.5) 81.1,0.5 81.1,0.9 ccw(c80.6,0.9) 80.6,1.4 74.5,1.4 cw(c74.5,1.9) 74,1.9 ccw(c73.5,1.9) 73.5,2.4 71.5,2.4 ccw(c71.5,1.9) 71,1.9 71,1.922 71,1 cw(c70,1) 70,0 69.4,0 ccw(c69.4,-0.5) 68.9,-0.5
cut-out: 50.4,-1.5 ccw(c50.9,-1.5) 50.9,-2 63.7,-2 ccw(c63.7,-1.5) 64.2,-1.5 64.2,-0.5 ccw(c63.7,-0.5) 63.7,0 63.1,0 cw(c63.1,0.5) 62.6,0.5 62.6,0.9 ccw(c62.1,0.9) 62.1,1.4 56,1.4 cw(c56,1.9) 55.5,1.9 ccw(c55,1.9) 55,2.4 53,2.4 ccw(c53,1.9) 52.5,1.9 52.5,1 cw(c51.5,1) 51.5,0 50.9,0 ccw(c50.9,-0.5) 50.4,-0.5
cut-out: 31.9,-1.5 ccw(c32.4,-1.5) 32.4,-2 45.2,-2 ccw(c45.2,-1.5) 45.7,-1.5 45.7,-0.5 ccw(c45.2,-0.5) 45.2,0 44.6,0 cw(c44.6,0.5) 44.1,0.5 44.1,0.9 ccw(c43.6,0.9) 43.6,1.4 37.5,1.4 cw(c37.5,1.9) 37,1.9 ccw(c36.5,1.9) 36.5,2.4 34.5,2.4 ccw(c34.5,1.9) 34,1.9 34,1.922 34,1 cw(c33,1) 33,0 32.4,0 ccw(c32.4,-0.5) 31.9,-0.5
cut-out: 13.4,-1.5 ccw(c13.9,-1.5) 13.9,-2 26.7,-2 ccw(c26.7,-1.5) 27.2,-1.5 27.2,-0.5 ccw(c26.7,-0.5) 26.7,0 26.1,0 cw(c26.1,0.5) 25.6,0.5 25.6,0.9 ccw(c25.1,0.9) 25.1,1.4 19,1.4 cw(c19,1.9) 18.5,1.9 ccw(c18,1.9) 18,2.4 16,2.4 ccw(c16,1.9) 15.5,1.9 15.5,1 cw(c14.5,1) 14.5,0 13.9,0 ccw(c13.9,-0.5) 13.4,-0.5
cut-out: -2,-1.5 -2,1.9 cw(c-1.5,1.9) -1.5,2.4 -0.5,2.4 cw(c-0.5,1.9) 0,1.9 ccw(c0.5,1.9) 0.5,1.4 6.6,1.4 cw(c6.6,0.9) 7.1,0.9 7.1,0.5 ccw(c7.6,0.5) 7.6,0 8.2,0 cw(c8.2,-0.5) 8.7,-0.5 8.7,-1.5 cw(c8.2,-1.5) 8.2,-2 -1.5,-2 cw(c-1.5,-1.5)

## Design rules (kind name [scope] priority, off if disabled: settings)
AssemblyTestPointUsage [All] p1: valid=2
AssemblyTestpoint [(IsPad And (OnTopLayer Or OnBottomLayer))] p1: testpointundercomponent=FALSE minsize=1.016 maxsize=2.54 preferedsize=1.524 minholesize=0 maxholesize=1.016 preferedholesize=0.813 testpointgrid=0.025 usegrid=TRUE gridtolerance=0 allowsidebottom=TRUE
BoardOutlineClearance [All] p1: gap=0.1 ignorepadtopadclearanceinfootprint=FALSE
Clearance [All] p1: gap=0.14 ignorepadtopadclearanceinfootprint=FALSE
ComponentClearance [All] p1 off: gap=0.254 collisioncheckmode=3 verticalgap=0.254 showdistances=FALSE
DiffPairsRouting [All] p1: maxlimit=0.254 minlimit=0.15 mostfreqgap=0.254 toplayer_minwidth=0.14 toplayer_maxwidth=0.381 toplayer_prefwidth=0.2 bottomlayer_minwidth=0.14 bottomlayer_maxwidth=0.381 bottomlayer_prefwidth=0.2 maxuncoupledlength=12.7
Height [All] p1: minheight=0 maxheight=100.4 prefheight=12.7
HoleSize [All] p1: absolutevalues=TRUE maxlimit=10 minlimit=0.127 maxpercent=80.000 minpercent=20.000
HoleToHoleClearance [All] p1: gap=0.241 allowstackedmicrovias=TRUE
MinimumAnnularRing [All] p1: minimumring=0.051
MinimumSolderMaskSliver [All] p1: minsoldermaskwidth=0.05
PasteMaskExpansion [All] p1: expansion=-0.05
PolygonConnect PWR [InNetClass('PWR') vs InNetClass('PWR')] p1: connectstyle=Direct reliefconductorwidth=0.254 reliefentries=4 polygonreliefangle="90 Angle" airgapwidth=0.254
PolygonConnect RF_GND [InNamedPolygon('GND_BOTTOM_RF')] p2: thpad.connectstyle=Relief thpad.reliefconductorwidth=0.254 thpad.reliefentries=4 thpad.polygonreliefangle="90 Angle" thpad.airgapwidth=0.1 smdpad.connectstyle=Relief smdpad.reliefconductorwidth=0.254 smdpad.reliefentries=4 smdpad.polygonreliefangle="90 Angle" smdpad.airgapwidth=0.1 via.connectstyle=Direct via.reliefconductorwidth=0.254 via.reliefentries=4 via.polygonreliefangle="90 Angle" via.airgapwidth=0.254
PolygonConnect GND [InNet('GND')] p3: thpad.connectstyle=Relief thpad.reliefconductorwidth=0.254 thpad.reliefentries=4 thpad.polygonreliefangle="90 Angle" thpad.airgapwidth=0.254 smdpad.connectstyle=Relief smdpad.reliefconductorwidth=0.254 smdpad.reliefentries=4 smdpad.polygonreliefangle="90 Angle" smdpad.airgapwidth=0.254 via.connectstyle=Direct via.reliefconductorwidth=0.254 via.reliefentries=4 via.polygonreliefangle="90 Angle" via.airgapwidth=0.254
PolygonConnect [All] p4: connectstyle=Direct reliefconductorwidth=0.254 reliefentries=4 polygonreliefangle="90 Angle" airgapwidth=0.254
RoutingVias [All] p1: holewidth=0.15 width=0.35 viastyle="Through Hole" minholewidth=0.127 minwidth=0.25 maxholewidth=0.6 maxwidth=1
SilkToSilkClearance [All] p1: silktosilkclearance=0.05
SilkToSolderMaskClearance [IsPad] p1: minsilkscreentomaskgap=0.05 clearancetoexposedcopper=TRUE
SolderMaskExpansion SolderMaskExpansion_via [IsVia] p1: expansion=0.102 istentingtop=TRUE
SolderMaskExpansion [All] p2: expansion=0.025 istentingtop=FALSE
UnRoutedNet [All] p1: checkbadconnections=TRUE
ViasUnderSMD [All] p1: allowed=TRUE
Width RF [InNetClass('RF')] p1: maxlimit=0.762 minlimit=0.154 preferedwidth=0.236 minimp=50.000000 maximp=50.000000 favimp=50.000000
Width [All] p2: maxlimit=30 minlimit=0.122 preferedwidth=0.2
18 further rules are at their usual default settings.

## Classes and differential pairs
net class RF: RF1 RF2 RF3
component class U_LED: Q14 TP1 TP31 U20
component class PABoostConverter: TP14 TP15 TP16
net class PWR: 3V0 5V0 PA_GATE_SWITCH PA_I_DIFF_N PA_I_DIFF_P PA_PRE_L PA_PST_L PABOOST_SW V_LOAD V_PA V_SYS

## Components (designator, comment, footprint, x,y, rotation, side; value= is the part's Value field where it differs from the comment)
MC806_1_1_1_1 "Mire_CMS" CMSMires 1.3,-3.7 r270 top (schematic designator MC804)
MC806_1_1_1_1_1 "Mire_CMS" CMSMires 1.3,92.1 r270 top (schematic designator MC804)
MC806_1_1_1_1_2 "Mire_CMS" CMSMires 143.7,92.1 r90 top (schematic designator MC804)
MC809_1_1_1_1 "Mire_CMS" CMSMires 4.15,-3.7 r270 bottom (schematic designator MC804)
MC809_1_1_1_1_1 "Mire_CMS" CMSMires 4.15,92.1 r270 bottom (schematic designator MC804)
MC809_1_1_1_1_2 "Mire_CMS" CMSMires 140.85,92.1 r90 bottom (schematic designator MC804)

## Footprints (in the part's own frame and the unit in brackets; to place one, negate y for a bottom-side part, rotate by r counter-clockwise, add the part's x,y. Pads: shape width x height; smd on the part's side, far side on the other; paste and mask are expansions set on the pad)
CMSMires [mm]
  round 0.8 smd paste-0.5 mask+0.2: 1(0,0)

## Part data
MC806_1_1_1_1 MC806_1_1_1_1_1 MC806_1_1_1_1_2 MC809_1_1_1_1 MC809_1_1_1_1_1 MC809_1_1_1_1_2: library part CMSMire, "Mire CMS", FAB=MaScir, REF_FAB=MC1

## Free pads (board coordinates)
  round 0 hole 2 unplated: ""(-3.7,-3.7) ""(-3.7,92.1) ""(148.7,92.1) ""(148.7,-3.7)

## Nets (pads, with @x,y where several pads share a name; then routed paths per layer and width w, separated by ;. In a path a pad name is that pad's centre, name@x,y a point inside that pad or via, vN(x,y) a via of type N, cw(c..) or ccw(c..) an arc to the next point about the centre after c; other vN are vias at no path point)
3V0: 
5V0: 
5V0_FB_AuC: 
5V0BOOST_SW: 
ADC_C\S\_uC: 
ADC_DIN_uC: 
ADC_DOUT_uC: 
ADC_SCLK_uC: 
BAT_NTC: 
Battery_Indicators_LED1: 
Battery_Indicators_LED2: 
Battery_LED1: 
Battery_LED2: 
Battery_LED3: 
Battery_LED4: 
BOOST_FB: 
BTN1: 
BTN1_uC: 
BTN2: 
BTN2_uC: 
CAP1: 
CAP1_uC: 
CAP2: 
CAP2_uC: 
CAP3: 
CAP3_uC: 
CAP4: 
CAP4_uC: 
CAP5: 
CAP5_uC: 
CAP6: 
CAP6_uC: 
CHG_BTST: 
CHG_ILIM: 
CHG_PMIP: 
CHG_QON: 
CHG_REGN: 
CHG_SW: 
CHG_TS_BIAS: 
Continuous_LED1: 
Continuous_LED2: 
DCC: 
DEC1: 
DEC3: 
DEC4_6: 
DEC5: 
Fluid_Indicators_LED1: 
Fluid_Indicators_LED2: 
GND: 
ILOAD: 
Intermittant_LED1: 
Intermittant_LED2: 
LED_SCL: 
LED_SDA: 
Neb_Indicators_LED1: 
Neb_Indicators_LED2: 
NetC200_2: 
NetC202_1: 
NetC216_1: 
NetC218_1: 
NetC219_1: 
NetC220_1: 
NetC222_1: 
NetC223_1: 
NetC225_2: 
NetC226_2: 
NetC407_2: 
NetC413_2: 
NetC500_1: 
NetC500_2: 
NetC501_2: 
NetC502_2: 
NetC503_1: 
NetC503_2: 
NetC504_1: 
NetC504_2: 
NetC700_2: 
NetC713_2: 
NetC903_2: 
NetC908_1: 
NetC919_1: 
NetJ700_1: 
NetJ700_2: 
NetL800_1: 
NetQ200_1: 
NetQ201_1: 
NetQ202_1: 
NetQ203_1: 
NetQ204_1: 
NetQ205_1: 
NetQ206_1: 
NetQ207_1: 
NetQ600_2: 
NetQ600_3: 
NetQ601_2: 
NetQ601_3: 
NetQ700_2: 
NetQ700_3: 
NetQ900_2: 
NetQ900_3: 
NetR209_1: 
NetR404_2: 
NetR407_2: 
NetR600_1: 
NetR602_1: 
NetR700_1: 
NetR709_1: 
NetR712_2: 
NetR713_1: 
NetR713_2: 
NetR900_1: 
NetR901_1: 
NetR904_2: 
NetR905_1: 
NetR906_2: 
NetR907_1: 
NetR915_2: 
NetTP704_TP: 
NetTP705_TP: 
NetTP706_TP: 
NetTP707_TP: 
NetTP708_TP: 
NetTP709_TP: 
NetU600_2: 
NetU600_3: 
NetU703_1: 
NetU704_1: 
NetU705_1: 
NetU800_A16: 
NetU800_B17: 
NetU800_B19: 
P0.00/XL1: 
P0.01/XL2: 
PA_GATE_HG: 
PA_GATE_LG: 
PA_GATE_SWITCH: 
PA_I_AuC: 
PA_I_DIFF_N: 
PA_I_DIFF_P: 
PA_PRE_L: 
PA_PST_L: 
PABOOST_BST: 
PABOOST_COMP: 
PABOOST_DAC_OUT: 
PABOOST_FB: 
PABOOST_SW: 
PABOOST_VCC: 
Power_Adapter_LED1: 
Power_Adapter_LED2: 
RF1: 
RF2: 
RF3: 
RST: 
RX: 
SCL_uC: 
SDA_uC: 
SUPPLY_PROT_PG_uC: 
SWDCLK: 
SWDIO: 
System_Indicators_LED1: 
System_Indicators_LED2: 
TEMP_ALERT_uC: 
TEST0: 
TEST1: 
TX: 
V_BAT: 
V_EXT: 
V_LOAD: 
V_LOAD_ENV: 
V_LOAD_ENV_FB_AuC: 
V_PA: 
V_PA_EN_uC: 
V_PA_FB_AuC: 
V_PA_IN_FB_AuC: 
V_SUPPLY: 
V_SYS: 
XC1: 
XC2: 
pads on no net: MC806_1_1_1_1.1 MC806_1_1_1_1_1.1 MC806_1_1_1_1_2.1 MC809_1_1_1_1.1 MC809_1_1_1_1_1.1 MC809_1_1_1_1_2.1

## Silkscreen, mask and mechanical layers (free items; w line width, h text height)
Dimensions:
  lines w0.127: -11.034,-5.994 -6.284,-5.994 ; -10.934,94.406 -6.184,94.406 ; -6,95.45 -6,100.2 ; 151,95.45 151,100.2
  lines w0.254: -12.667,-1 -11,-6 ; -12.667,89.4 -11,94.4 ; -11.254,-6 -10.746,-6 ; -11.254,94.4 -10.746,94.4 ; -11,33.418 -11,-6 ; -11,54.982 -11,94.4 ; -9.333,-1 -11,-6 ; -9.333,89.4 -11,94.4 ; -6,100.046 -6,100.554 ; -1,98.633 -6,100.3 ; -1,101.967 -6,100.3 ; 63.465,100.3 -6,100.3 ; 81.535,100.3 151,100.3 ; 146,98.633 151,100.3 ; 146,101.967 151,100.3 ; 151,100.046 151,100.554
  text "157 (mm)" at 63.719,98.361 h5
  text "100.4 (mm)" at -9.061,33.672 h5 r90
Panel Shape/ Cutout:
  drawing of 1686 lines, arcs and shapes, not listed
  text "CNC" at -1.45,88.9 h1.1
  text "V-CUT" at 156.3,79.35 h1.1
  text "CNC" at 1.45,79.1 h1.1
  text "CNC" at 18.75,79 h1.1
  text "CNC" at 37.25,79 h1.1
  text "CNC" at 55.75,79 h1.1
  text "CNC" at 74.25,79 h1.1
  text "CNC" at 92.75,79 h1.1
  text "CNC" at 111.25,79 h1.1
  text "CNC" at 129.75,79 h1.1
  text "CNC" at 143.5,78.5 h1.1
  text "CNC" at -1.45,72.9 h1.1
  text "V-CUT" at 156.3,63.35 h1.1
  text "CNC" at 1.45,63.1 h1.1
  text "CNC" at 18.75,63 h1.1
  text "CNC" at 37.25,63 h1.1
  text "CNC" at 55.75,63 h1.1
  text "CNC" at 74.25,63 h1.1
  text "CNC" at 92.75,63 h1.1
  text "CNC" at 111.25,63 h1.1
  text "CNC" at 129.75,63 h1.1
  text "CNC" at 143.5,62.5 h1.1
  text "CNC" at -1.45,56.9 h1.1
  text "V-CUT" at 156.3,47.35 h1.1
  text "CNC" at 1.45,47.1 h1.1
  text "CNC" at 18.75,47 h1.1
  text "CNC" at 37.25,47 h1.1
  text "CNC" at 55.75,47 h1.1
  text "CNC" at 74.25,47 h1.1
  text "CNC" at 92.75,47 h1.1
  text "CNC" at 111.25,47 h1.1
  text "CNC" at 129.75,47 h1.1
  text "CNC" at 143.5,46.5 h1.1
  text "CNC" at -1.45,40.9 h1.1
  text "V-CUT" at 156.3,31.35 h1.1
  text "CNC" at 1.45,31.1 h1.1
  text "CNC" at 18.75,31 h1.1
  text "CNC" at 37.25,31 h1.1
  text "CNC" at 55.75,31 h1.1
  text "CNC" at 74.25,31 h1.1
  text "CNC" at 92.75,31 h1.1
  text "CNC" at 111.25,31 h1.1
  text "CNC" at 129.75,31 h1.1
  text "CNC" at 143.5,30.5 h1.1
  text "CNC" at -1.45,24.9 h1.1
  text "V-CUT" at 156.3,15.35 h1.1
  text "CNC" at 1.45,15.1 h1.1
  text "CNC" at 18.75,15 h1.1
  text "CNC" at 37.25,15 h1.1
  text "CNC" at 55.75,15 h1.1
  text "CNC" at 74.25,15 h1.1
  text "CNC" at 92.75,15 h1.1
  text "CNC" at 111.25,15 h1.1
  text "CNC" at 129.75,15 h1.1
  text "CNC" at 143.5,14.5 h1.1
  text "CNC" at -1.45,8.9 h1.1
  text "V-CUT" at 156.3,-0.65 h1.1
  text "CNC" at 1.45,-0.9 h1.1
  text "CNC" at 18.75,-1 h1.1
  text "CNC" at 37.25,-1 h1.1
  text "CNC" at 55.75,-1 h1.1
  text "CNC" at 74.25,-1 h1.1
  text "CNC" at 92.75,-1 h1.1
  text "CNC" at 111.25,-1 h1.1
  text "CNC" at 129.75,-1 h1.1
  text "CNC" at 143.5,-1.5 h1.1
  text "V-CUT" at 0.55,-16.316 h1.1 r90
  text "V-CUT" at 16.05,-16.316 h1.1 r90
  text "V-CUT" at 19.05,-16.316 h1.1 r90
  text "V-CUT" at 34.55,-16.316 h1.1 r90
  text "V-CUT" at 37.55,-16.316 h1.1 r90
  text "V-CUT" at 53.05,-16.316 h1.1 r90
  text "V-CUT" at 56.05,-16.316 h1.1 r90
  text "V-CUT" at 71.55,-16.316 h1.1 r90
  text "V-CUT" at 74.55,-16.316 h1.1 r90
  text "V-CUT" at 90.05,-16.316 h1.1 r90
  text "V-CUT" at 93.05,-16.316 h1.1 r90
  text "V-CUT" at 108.55,-16.316 h1.1 r90
  text "V-CUT" at 111.55,-16.316 h1.1 r90
  text "V-CUT" at 127.05,-16.316 h1.1 r90
  text "V-CUT" at 130.05,-16.316 h1.1 r90
  text "V-CUT" at 145.55,-16.316 h1.1 r90

## Panel: embedded boards
"Pcb.PcbDoc" at 0,80, 1 rows x 8 columns, spacing 36 x 18.501, rotation 0
"Pcb.PcbDoc" at 0,48, 1 rows x 8 columns, spacing 36 x 18.501, rotation 0
"Pcb.PcbDoc" at 0,64, 1 rows x 8 columns, spacing 36 x 18.501, rotation 0
"Pcb.PcbDoc" at 0,32, 1 rows x 8 columns, spacing 36 x 18.501, rotation 0
"Pcb.PcbDoc" at 0,16, 1 rows x 8 columns, spacing 36 x 18.501, rotation 0
"Pcb.PcbDoc" at 0,0, 1 rows x 8 columns, spacing 36 x 18.501, rotation 0